# Altium PCB SFarm.PcbDoc (part 1 of 2)
Units mil, origin at the board's own origin, x right, y up, seen from the top; angles counter-clockwise.
Board outline 5511.81 x 3149.61 mil, 2 copper layers (Top Layer, Bottom Layer), stack 61.855 mil thick; 89 components, 71 nets, 378 pads, 334 vias.
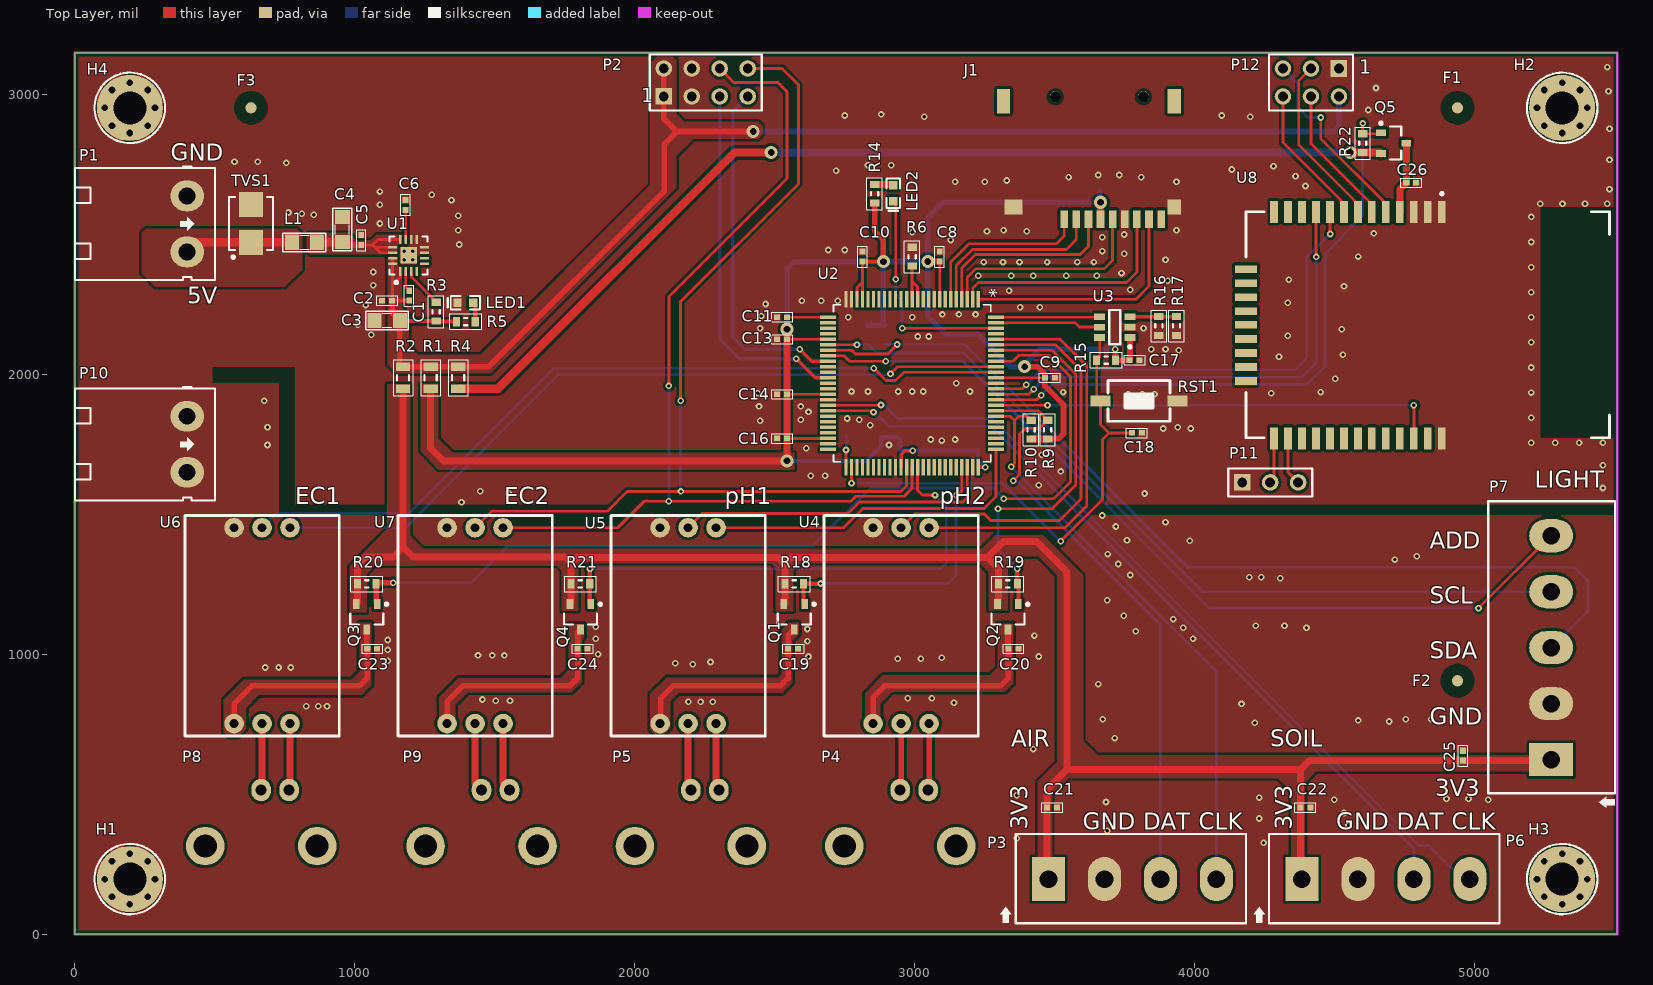
[diagram p0: Top Layer view]
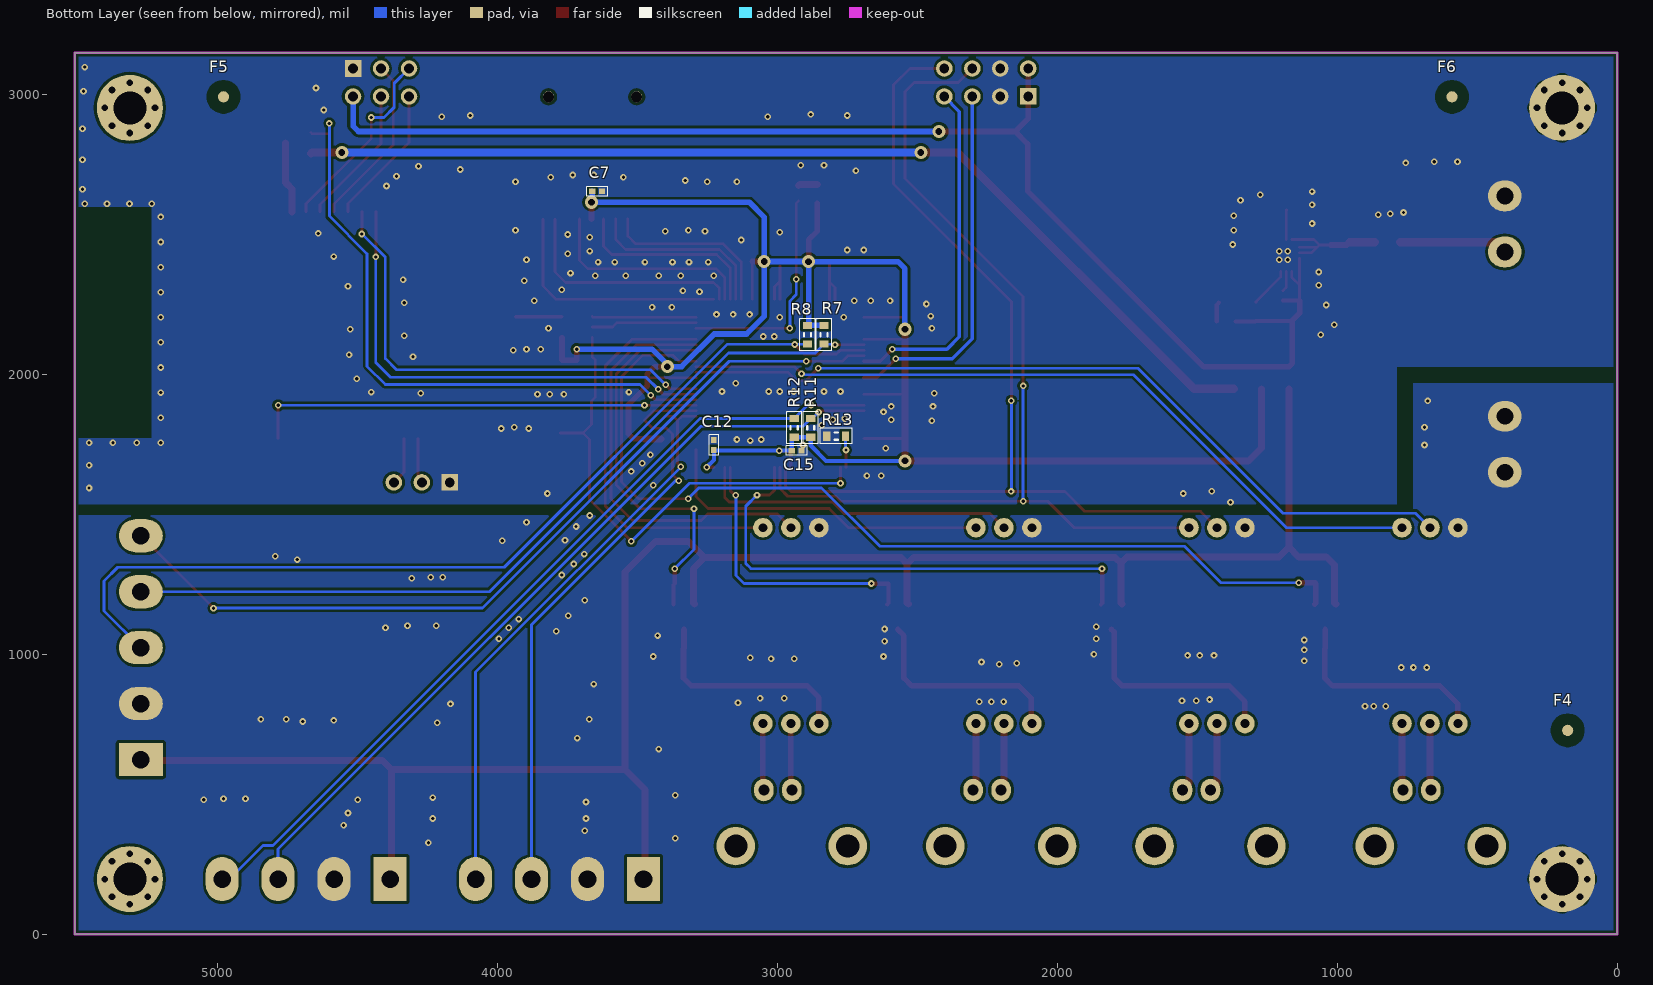
[diagram p1: Bottom Layer view, seen from below]
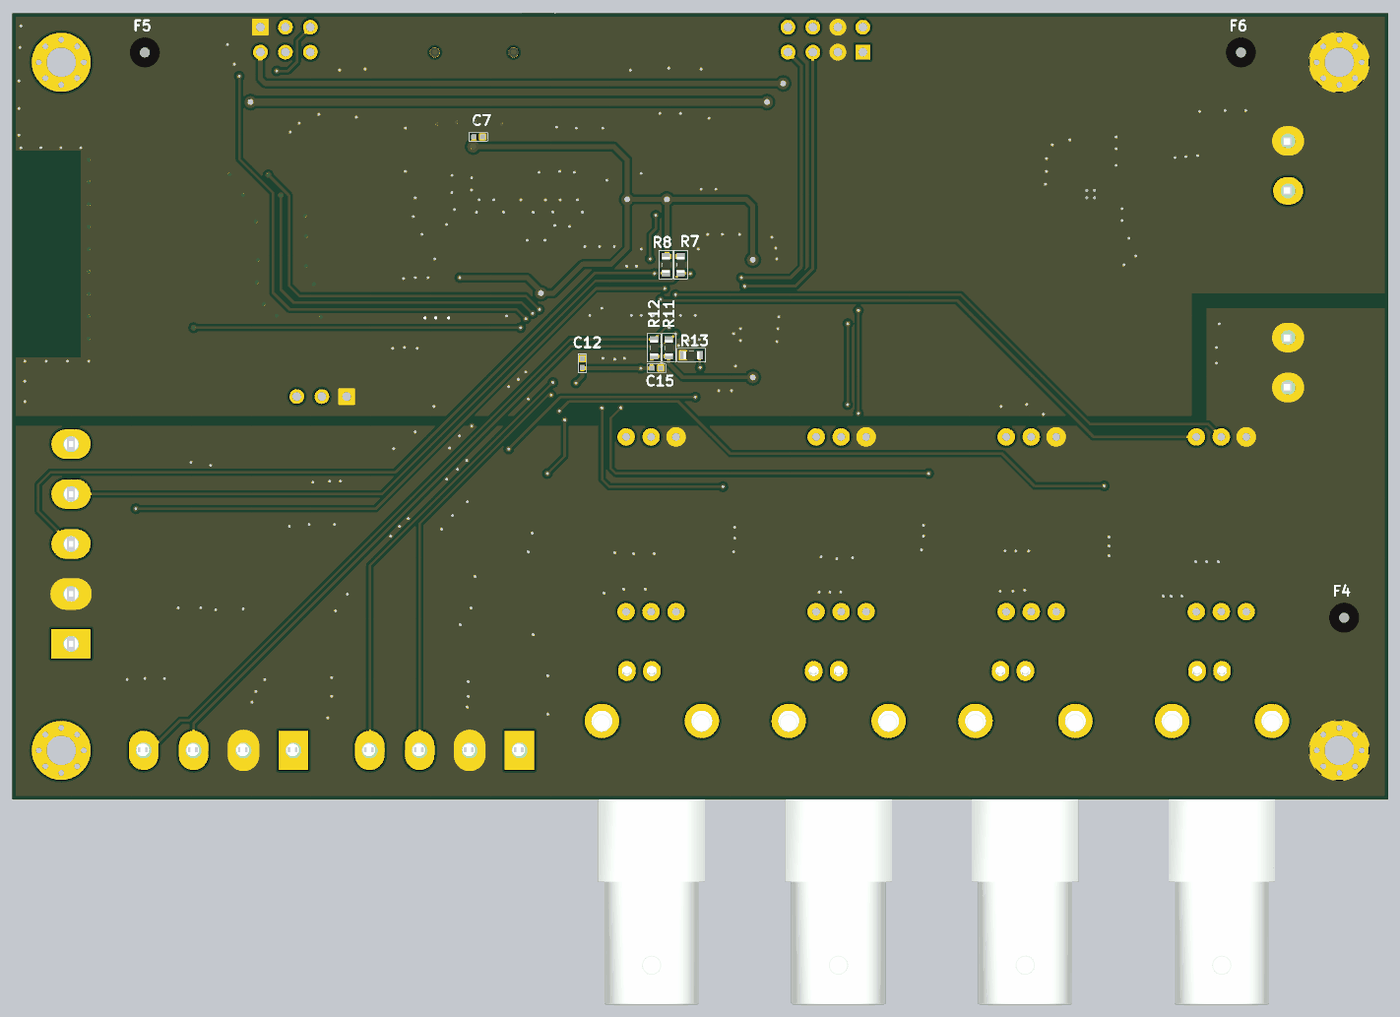
[diagram p2: 3D render of the assembled board from below, using the file's embedded part models]

## Layer stack, top to bottom
Top Solder: solder mask 0.4, Solder Resist, Dk 3.5
Top Layer: signal copper 1.4
Dielectric 1: dielectric 59.0551, FR-4, Dk 4.8
Bottom Layer: signal copper 1.4
Bottom Solder: solder mask 0.4, Solder Resist, Dk 3.5

## Board outline
0,0 5511.81,0 5511.81,3149.61 0,3149.61

## Design rules (kind name [scope] priority, off if disabled: settings)
Clearance Clearance_PR [All vs InPolygon] p1: gap=10 ignorepadtopadclearanceinfootprint=FALSE
Clearance [All] p2: gap=6 ignorepadtopadclearanceinfootprint=FALSE
HoleSize [All] p1: absolutevalues=TRUE maxlimit=1000 minlimit=1 maxpercent=80.000 minpercent=20.000
HoleToHoleClearance [All] p1: gap=1 allowstackedmicrovias=TRUE
MinimumSolderMaskSliver [All] p1: minsoldermaskwidth=1
PolygonConnect [All] p1: connectstyle=Direct reliefconductorwidth=10 reliefentries=4 polygonreliefangle="90 Angle" airgapwidth=10
RoutingVias [All] p1: holewidth=11.81 width=23.62 viastyle="Through Hole" minholewidth=11.81 minwidth=23.62 maxholewidth=23.62 maxwidth=47.24
SilkToSilkClearance [All] p1: silktosilkclearance=1
SilkToSolderMaskClearance [IsPad] p1: minsilkscreentomaskgap=1 clearancetoexposedcopper=TRUE
SolderMaskExpansion [All] p1: expansion=4
Width [All] p1: maxlimit=40 minlimit=8 preferedwidth=12
25 further rules are at their usual default settings.

## Classes and differential pairs
component class SENSOR: C19 C20 C21 C22 C23 C24 C25 P3 P4 P5 P6 P7 P8 P9 P10 Q1 Q2 Q3 Q4 R18 R19 R20 R21 U4 U5 U6 U7
component class POWER: C1 C2 C3 C4 C5 C6 F1 F2 F3 H1 H2 H3 H4 L1 LED1 P1 R1 R2 R3 R4 R5 TVS1 U1
component class MCU: C7 C8 C9 C10 C11 C12 C13 C14 C15 C16 C17 C18 J1 LED2 P2 R6 R7 R8 R9 R10 R11 R12 R13 R14 R15 R16 R17 RST1 U2 U3
component class CONNECTIVITY: C26 P11 P12 Q5 R22 U8

## Components (designator, comment, footprint, x,y, rotation, side; value= is the part's Value field where it differs from the comment)
C1 "0.1µF" C0402M 1194.88,2281.5 r270 top
C2 "0.1µF" C0402M 1116.14,2263.78 r0 top
C3 "10µF" "0805 cap" 1071.42,2192.91 r0 top
C4 "10µF" "0805 cap" 956.69,2562.44 r270 top
C5 "0.1µF" C0402M 1023.62,2480.32 r270 top
C6 "0.1µF" C0402M 1182,2606 r270 top
C7 "0.1µF" C0402M 3645,2654 r180 bottom
C8 "0.1µF" C0402M 3090.55,2421.26 r90 top
C9 "0.1µF" C0402M 3484.25,1988.19 r0 top
C10 "0.1µF" C0402M 2815,2421 r90 top
C11 "0.1µF" C0402M 2527.56,2204.72 r180 top
C12 "0.1µF" C0402M 3228,1748 r90 bottom
C13 "0.1µF" C0402M 2527.56,2125.98 r180 top
C14 "0.1µF" C0402M 2527.56,1929.13 r0 top
C15 "0.1µF" C0402M 2932,1728 r180 bottom
C16 "0.1µF" C0402M 2527.56,1771.65 r0 top
C17 "0.1µF" C0402M 3787.4,2051.18 r180 top
C18 "0.1µF" C0402M 3795.28,1791.34 r180 top
C19 "0.1µF" C0402M 2566.93,1019.68 r180 top
C20 "0.1µF" C0402M 3354.33,1019.68 r180 top
C21 "0.1µF" C0402M 3492.13,452.76 r180 top
C22 "0.1µF" C0402M 4397.64,452.76 r180 top
C23 "0.1µF" C0402M 1062.99,1019.68 r180 top
C24 "0.1µF" C0402M 1814.96,1019.68 r180 top
C25 "0.1µF" C0402M 4960.63,637.8 r270 top
C26 "0.1uF" C0402M 4775.59,2685.04 r180 top
F1 "" fiducials 4940.94,2952.76 r0 top
F2 "" fiducials 4940.94,905.51 r0 top
F3 "" fiducials 629.92,2952.76 r0 top
F4 "" fiducials 177.17,728.35 r180 bottom (schematic designator F3)
F5 "" fiducials 4980.32,2992.13 r180 bottom (schematic designator F3)
F6 "" fiducials 590.55,2992.13 r180 bottom (schematic designator F3)
H1 "HoleM3" HOLEM3via 196.85,196.85 r0 top
H2 "HoleM3" HOLEM3via 5314.96,2952.76 r0 top
H3 "HoleM3" HOLEM3via 5314.96,196.85 r0 top
H4 "HoleM3" HOLEM3via 196.85,2952.76 r0 top
J1 "Header 11" TF_V3 3318.9,2976.38 r180 top
L1 "42" 0805F 776.14,2472.44 r0 top
LED1 "LedRed0603" 0603LED-RED 1397.64,2255.91 r180 top
LED2 "LedGreen0603" 0603LED-GREEN 2925.2,2649.61 r270 top
P1 "Header 2" HED2T 401.57,2637.8 r270 top
P2 "Header 4X2H" HDR2X4 2104.72,2993.31 r0 top
P3 "Header 4H" TERMINAL4_5.08 3779.53,196.85 r0 top
P4 "BNC connector" BNC 2949.61,514.96 r180 top
P5 "BNC connector" BNC 2201.57,514.96 r180 top
P6 "Header 4H" TERMINAL4_5.08 4685.04,196.85 r0 top
P7 "Header 5" TERMINAL5_5.08 5275.59,1023.62 r90 top
P8 "BNC connector" BNC 666.14,514.96 r180 top
P9 "BNC connector" BNC 1453.54,514.96 r180 top
P10 "Header 2" HED2T 401.57,1850.39 r270 top
P11 "Header 3" HDR1X3 4271.65,1614.17 r0 top
P12 "Header 3X2" HDR2X3 4417.32,3043.31 r180 top
Q1 "AO3401" SOT23-3N 2570.87,1133.86 r270 top
Q2 "AO3401" SOT23-3N 3334.65,1133.86 r270 top
Q3 "AO3401" SOT23-3N 1043.31,1133.86 r270 top
Q4 "AO3401" SOT23-3N 1807.09,1133.86 r270 top
Q5 "AO3401" SOT23-3N 4712.6,2826.77 r0 top
R1 "0" R0805M 1271.65,1988.19 r270 top
R2 "0" R0805M 1173.23,1988.19 r270 top
R3 "1.5k" R0603M 1291.34,2224.41 r270 top
R4 "0" R0805M 1370.08,1988.19 r270 top
R5 "1k" R0603M 1397.64,2188.98 r180 top
R6 "10k" R0603M 2992.13,2421.26 r270 top
R7 "10k" R0603M 2834.65,2141.73 r90 bottom
R8 "10k" R0603M 2893.7,2141.73 r90 bottom
R9 "10k" R0603M 3476.38,1803.15 r270 top
R10 "10k" R0603M 3417.32,1803.15 r270 top
R11 "10k" R0603M 2881.89,1809.3 r270 bottom
R12 "10k" R0603M 2940.94,1809.3 r270 bottom
R13 "0.0" R0603M 2791.34,1779.53 r180 bottom
R14 "1k" R0603M 2858.27,2645.67 r90 top
R15 "10k" R0603M 3685.04,2051.18 r180 top
R16 "187k" R0603M 3874.02,2173.23 r90 top
R17 "182k" R0603M 3937.01,2173.23 r90 top
R18 "10k" R0603M 2570.87,1251.97 r180 top
R19 "10k" R0603M 3334.65,1251.97 r180 top
R20 "10k" R0603M 1043.31,1251.97 r180 top
R21 "10k" R0603M 1807.09,1251.97 r180 top
R22 "10k" R0603M 4602.36,2826.77 r270 top
RST1 "Button" SWSMD 3803.15,1905.51 r180 top
TVS1 "SMBJ7.0A" DIOM4436X26N 629.92,2539.37 r90 top
U1 "TPS7A7100" QFN16 1192.91,2425.2 r90 top
U2 "MK64FN1M0VLL12" LQFP-100_14X14X1 2992.13,1968.5 r270 top
U3 "TPL5010-Q1" SOT23-6 3716.54,2169.29 r180 top
U4 "pH AFE" "pH AFE" 2952.76,1102.36 r90 top
U5 "pH AFE" "pH AFE" 2191.6,1102.36 r90 top
U6 "pH AFE" "pH AFE" 669.29,1102.36 r90 top
U7 "pH AFE" "pH AFE" 1430.45,1102.36 r90 top
U8 "VZIGMOD1" VZIGMOD2 4185.04,2581.1 r270 top

## Footprints (in the part's own frame and the unit in brackets; to place one, negate y for a bottom-side part, rotate by r counter-clockwise, add the part's x,y. Pads: shape width x height; smd on the part's side, far side on the other; paste and mask are expansions set on the pad)
0603LED-GREEN [mil]
  rect 30x30 smd: 1(-26,0) 2(30,0)
  silkscreen extent -50,-24 65,24, body extent -29,-16 33,16, height 24
0603LED-RED [mil]
  rect 30x30 smd: 1(-26,0) 2(30,0)
  silkscreen extent -50,-24 65,24, body extent -31,-16 32,16, height 24
"0805 cap" [mil]
  rect 50x55 smd: 1(0,0) 2(90,0)
  silkscreen extent -32,-34 121,33, body extent 5,-27 85,23, height 24
0805F [mil]
  rect 50x55 smd: 1(0,0) 2(90,0)
  silkscreen extent -32,-34 121,33, body extent 6,-27 85,23, height 33
BNC [mm] "BNC connector"
  oval 1.778x2.032 hole 1: 1(0,0) 2(-2.54,0)
  round 3.5 hole 2.1: 3(-5.08,5.08) 3(5.08,5.08)
  body extent -7.41,-1.82 7.35,33.93, height 15.21
C0402M [mm] "Capacitor 0402"
  rect 0.55x0.51 smd: 1(-0.45,0) 2(0.45,0)
  silkscreen extent -0.95,-0.43 0.95,0.43, body extent -0.53,-0.28 0.53,0.27, height 0.55
DIOM4436X26N [mm] "Molded Diode, 2-Leads, Body 4.40x3.62mm, IPC Medium Density"
  rect 2.3x2.15 smd: 1(1.725,0) 2(-1.725,0)
  silkscreen extent -3.17,-2 2.4,2, body extent -2.6,-1.97 2.6,1.97, height 2.61
fiducials [mil]
  round 40 smd mask+40: ""(0,0)
  Top Layer pour cut-out: 0,-60 -22.96,-55.43 -42.43,-42.43 -55.43,-22.96 -60,0 -60,0 -55.43,22.96 -42.43,42.43 -22.96,55.43 0,60 0,60 22.96,55.43 42.43,42.43 55.43,22.96 60,0 60,0 55.43,-22.96 42.43,-42.43 22.96,-55.43 0,-60
HDR1X3 [mm] "Connector; Header; 3 Position"
  rect 1.5x1.5 hole 0.9: 1(-2.54,0)
  round 1.5 hole 0.9: 2(0,0) 3(2.54,0)
  silkscreen extent -3.81,-1.27 3.81,1.27
HDR2X3 [mm] "Connector; Header; 3x2 Position"
  rect 1.5x1.5 hole 0.9: 1(-2.54,-1.27)
  round 1.5 hole 0.9: 2(-2.54,1.27) 3(0,-1.27) 4(0,1.27) 5(2.54,-1.27) 6(2.54,1.27)
  silkscreen extent -3.81,-2.54 3.81,2.54
HDR2X4 [mm] "Connector; Header; 4x2 Position"
  rect 1.5x1.5 hole 0.9: 1(0,0)
  round 1.5 hole 0.9: 2(0,2.54) 3(2.54,0) 4(2.54,2.54) 5(5.08,0) 6(5.08,2.54) 7(7.62,0) 8(7.62,2.54)
  silkscreen extent -1.27,-1.27 8.89,3.81
HED2T [mil] "Header 2, 2 pin, hight 300mil, Pin to Pin 200, Colour Green"
  oval 110x120 hole 60: 1(0,0) 2(200,0)
  silkscreen extent -105,-400 300,100, body extent -97,-399 297,73, height 334
HOLEM3via [mm]
  round 6 hole 3: ""(0,0)
  silkscreen extent -3.19,-3.2 3.2,3.2
LQFP-100_14X14X1 [mm]
  rect 1.461x0.3 smd: 1(-7.625,6) 2(-7.625,5.5) 3(-7.625,5) 4(-7.625,4.5) 5(-7.625,4) 6(-7.625,3.5) 7(-7.625,3) 8(-7.625,2.5) 9(-7.625,2) 10(-7.625,1.5) 11(-7.625,1) 12(-7.625,0.5) 13(-7.625,0) 14(-7.625,-0.5) 15(-7.625,-1) 16(-7.625,-1.5) 17(-7.625,-2) 18(-7.625,-2.5) 19(-7.625,-3) 20(-7.625,-3.5) 21(-7.625,-4) 22(-7.625,-4.5) 23(-7.625,-5) 24(-7.625,-5.5) 25(-7.625,-6) 51(7.625,-6) 52(7.625,-5.5) 53(7.625,-5) 54(7.625,-4.5) 55(7.625,-4) 56(7.625,-3.5) 57(7.625,-3) 58(7.625,-2.5) 59(7.625,-2) 60(7.625,-1.5) 61(7.625,-1) 62(7.625,-0.5) 63(7.625,0) 64(7.625,0.5) 65(7.625,1) 66(7.625,1.5) 67(7.625,2) 68(7.625,2.5) 69(7.625,3) 70(7.625,3.5) 71(7.625,4) 72(7.625,4.5) 73(7.625,5) 74(7.625,5.5) 75(7.625,6)
  rect 0.3x1.461 smd: 26(-6,-7.625) 27(-5.5,-7.625) 28(-5,-7.625) 29(-4.5,-7.625) 30(-4,-7.625) 31(-3.5,-7.625) 32(-3,-7.625) 33(-2.5,-7.625) 34(-2,-7.625) 35(-1.5,-7.625) 36(-1,-7.625) 37(-0.5,-7.625) 38(0,-7.625) 39(0.5,-7.625) 40(1,-7.625) 41(1.5,-7.625) 42(2,-7.625) 43(2.5,-7.625) 44(3,-7.625) 45(3.5,-7.625) 46(4,-7.625) 47(4.5,-7.625) 48(5,-7.625) 49(5.5,-7.625) 50(6,-7.625) 76(6,7.625) 77(5.5,7.625) 78(5,7.625) 79(4.5,7.625) 80(4,7.625) 81(3.5,7.625) 82(3,7.625) 83(2.5,7.625) 84(2,7.625) 85(1.5,7.625) 86(1,7.625) 87(0.5,7.625) 88(0,7.625) 89(-0.5,7.625) 90(-1,7.625) 91(-1.5,7.625) 92(-2,7.625) 93(-2.5,7.625) 94(-3,7.625) 95(-3.5,7.625) 96(-4,7.625) 97(-4.5,7.625) 98(-5,7.625) 99(-5.5,7.625) 100(-6,7.625)
  silkscreen extent -7.13,-7.13 7.13,7.13, body extent -6.86,-6.86 6.86,6.86, height 0.3
"pH AFE" [mil]
  round 70 hole 31.5: 1(-350,100) 2(-350,0) 3(-350,-100) 4(350,-100) 5(350,0) 6(350,100)
  silkscreen extent -394,-276 394,276, body extent -394,-275 393,276, height 79
QFN16 [mm] "QFN, 16-Leads, Body 3.00x3.00mm, Pitch 0.50mm, Thermal Pad 1.66x1.66mm, IPC Medium Density"
  oval 0.85x0.25 smd: 1(-1.45,0.75) 2(-1.45,0.25) 3(-1.45,-0.25) 4(-1.45,-0.75) 9(1.45,-0.75) 10(1.45,-0.25) 11(1.45,0.25) 12(1.45,0.75)
  oval 0.25x0.85 smd: 5(-0.75,-1.45) 6(-0.25,-1.45) 7(0.25,-1.45) 8(0.75,-1.45) 13(0.75,1.45) 14(0.25,1.45) 15(-0.25,1.45) 16(-0.75,1.45)
  rect 1.5x1.5 smd: 17(0,0)
  silkscreen extent -2.57,-1.73 1.73,1.73, body extent -1.58,-1.58 1.58,1.58, height 1
R0603M [mm] "Chip Resistor 0603"
  rect 0.65x0.85 smd: 1(-0.85,0) 2(0.85,0)
  silkscreen extent -1.45,-0.7 1.45,0.7, body extent -0.8,-0.4 0.8,0.4, height 0.55
R0805M [mm] "Chip Resistor 0805"
  rect 0.75x1.3 smd: 1(-1,0) 2(1,0)
  silkscreen extent -1.65,-0.9 1.65,0.9, body extent -1,-0.63 1,0.63, height 0.6
SOT23-3N [mm] "SOT23, 3-Leads, Body 2.90x2.30mm, Pitch 0.95mm, IPC Medium Density"
  rect 0.9x0.6 smd: 1(-1.15,0.95) 2(-1.15,-0.95) 3(1.15,0)
  silkscreen extent -1.27,-1.5 0.7,1.93, body extent -0.7,-1.5 0.7,1.5, height 1.1
SOT23-6 [mm] "SOT23, 6-Leads, Body 2.90x2.80mm, Pitch 0.95mm, IPC Medium Density"
  rect 1x0.6 smd: 1(-1.375,0.95) 2(-1.375,0) 3(-1.375,-0.95) 4(1.375,-0.95) 5(1.375,0) 6(1.375,0.95)
  silkscreen extent -1.5,-1.55 0.5,1.92, body extent -0.88,-1.52 0.87,1.53, height 1.45
SWSMD [mm]
  rect 1.8x1 smd: 1(-3.5,0) 2(3.5,0)
  silkscreen extent -2.82,-1.85 2.82,1.85, body extent -3.05,-1.85 3.05,1.85, height 2.5
TERMINAL4_5.08 [mm]
  rect 3x4 hole 1.6: 1(-7.62,0)
  oval 3x4 hole 1.6: 2(-2.54,0) 3(2.54,0) 4(7.62,0)
  silkscreen extent -12,-4 10.3,4.1, body extent -10.64,-4 10.25,4.1, height 10
TERMINAL5_5.08 [mm]
  rect 3x4 hole 1.6: 1(-10.16,0)
  oval 3x4 hole 1.6: 2(-5.08,0) 3(0,0) 4(5.08,0) 5(10.16,0)
  silkscreen extent -14.54,-5.8 13.3,5.7, body extent -13.29,-5.9 13.29,5.72, height 18
TF_V3 [mm]
  round 1 hole 1: 0(-12.7,-0.4) 0(-4.7,-0.4)
  rect 0.7x1.6 smd: 1(-5.5,10.7) 2(-6.6,10.7) 3(-7.7,10.7) 4(-8.8,10.7) 5(-9.9,10.7) 6(-11,10.7) 7(-12.1,10.7) 8(-13.2,10.7) 9(-14.3,10.7)
  rect 1.2x1.4 smd: 10(-15.5,9.6)
  rect 1.6x1.4 smd: 11(-0.9,9.6)
  rect 1.2x2.2 smd: 12(0,0) 13(-15.5,0)
  body extent -15.79,-4.46 0.31,10.54, height 1.85
VZIGMOD2 [mm]
  rect 2x0.7 smd: 1(0,17.78) 2(0,16.51) 3(0,15.24) 4(0,13.97) 5(0,12.7) 6(0,11.43) 7(0,10.16) 8(0,8.89) 9(0,7.62) 10(0,6.35) 11(0,5.08) 12(0,3.81) 13(0,2.54) 23(20.56,2.54) 24(20.56,3.81) 25(20.56,5.08) 26(20.56,6.35) 27(20.56,7.62) 28(20.56,8.89) 29(20.56,10.16) 30(20.56,11.43) 31(20.56,12.7) 32(20.56,13.97) 33(20.56,15.24) 34(20.56,16.51) 35(20.56,17.78)
  rect 0.7x2 smd: 14(5.2,0) 15(6.47,0) 16(7.74,0) 17(9.01,0) 18(10.25,0) 19(11.55,0) 20(12.82,0) 21(14.09,0) 22(15.36,0)
  silkscreen extent -1.79,0 20.5,33, body extent 0,0 20.5,33, height 2.05

## Part data
C1 C2 C5 C6 C7 C8 C9 C10 C11 C12 C13 C14 C15 C16 C17 C18 C19 C20 C21 C22 C23 C24 C25: library part CAP0.1u0402, "CAP CER 0.1UF 10V X7R 0402", Manufacturer="Taiyo Yuden", Manufacturer Part Number=LMK105B7104KVHF, Operating Temperature="-55°C ~ 125°C", Package / Case="0402 (1005 Metric)", Ratings=AEC-Q200, Supplier Part Number 1=587-3769-1-ND, Temperature Coefficient=X7R, Tolerance=±10%, Voltage - Rated=10V, Applications=Automotive, Capacitance=0.1µF, Category=Capacitors, ComponentLink1Description=http://www.yuden.co.jp/productdata/catalog/en/mlcc_all_hq_e.pdf, ComponentLink1URL=http://www.yuden.co.jp/productdata/catalog/en/mlcc_all_hq_e.pdf, Features=-, Height - Seated (Max)=-, Lead Spacing=-, Lead Style=-, Mounting Type="Surface Mount, MLCC", Packaging="Cut Tape (CT)", Part Status=Active, Pricing 1="1=0.1, 10=0.05, 100=0.0223, 500=0.01594, 1000=0.01252, 2500=0.01138, 5000=0.01047 (USD)", RoHS="RoHS Compliant", Size / Dimension="0.039\" L x 0.020\" W (1.00mm x 0.50mm)", Stock 1=23930, Supplier 1=Digi-Key, Thickness (Max)="0.022\" (0.55mm)"
C3 C4: library part cap10u0805, "CAP CER 10UF 16V X7R 0805", Manufacturer="Taiyo Yuden", Manufacturer Part Number=EMK212BB7106MG-T, Operating Temperature="-55°C ~ 125°C", Package / Case="0805 (2012 Metric)", Ratings=-, Supplier Part Number 1=587-3319-1-ND, Temperature Coefficient=X7R, Tolerance=±20%, Voltage - Rated=16V, Applications="General Purpose", Capacitance=10µF, Category=Capacitors, ComponentLink1Description=http://www.yuden.co.jp/productdata/catalog/en/mlcc06_e.pdf, ComponentLink1URL=http://www.yuden.co.jp/productdata/catalog/en/mlcc06_e.pdf, Features=-, Height - Seated (Max)=-, Lead Spacing=-, Lead Style=-, Mounting Type="Surface Mount, MLCC", Packaging="Cut Tape (CT)", Part Status=Active, Pricing 1="1=0.51, 10=0.351, 100=0.2106, 500=0.15798, 1000=0.1334 (USD)", RoHS="RoHS Compliant", Size / Dimension="0.079\" L x 0.049\" W (2.00mm x 1.25mm)", Stock 1=221600, Supplier 1=Digi-Key, Thickness (Max)="0.053\" (1.35mm)"
C26: library part CAP0.1u0402, "CAP CER 0.1UF 16V X7R 0402", Manufacturer="Samsung Electro-Mechanics", Manufacturer Part Number=CL05B104KO5NNNC, Operating Temperature="-55°C ~ 125°C", Package / Case="0402 (1005 Metric)", Ratings=-, Supplier Part Number 1=1276-1001-6-ND, Temperature Coefficient=X7R, Tolerance=±10%, Voltage - Rated=16V, Applications="General Purpose", Category=Capacitors, ComponentLink1Description=http://www.samsungsem.com/kr/support/product-search/mlcc/CL05B104KO5NNNC.jsp, ComponentLink1URL=http://www.samsungsem.com/kr/support/product-search/mlcc/CL05B104KO5NNNC.jsp, Features=-, Height - Seated (Max)=-, Lead Spacing=-, Lead Style=-, Module=Connectivity, Mounting Type="Surface Mount, MLCC", Notification="Current market demand for these product types have resulted in fluctuating and extending lead times. Lead times may differ.", Packaging=Digi-Reel®, Part Status=Active, Pricing 1="1=0.1, 10=0.03, 100=0.0134, 500=0.00958, 1000=0.00753, 2500=0.00684, 5000=0.0063 (USD)", RoHS="RoHS Compliant", Size / Dimension="0.039\" L x 0.020\" W (1.00mm x 0.50mm)", Stock 1=100000, Supplier 1=Digi-Key, Thickness (Max)="0.022\" (0.55mm)"
F1 F2 F3 F4 F5 F6: library part Fiducials
J1: "Header, 11-Pin", LatestRevisionDate=17-Jul-2002, LatestRevisionNote="Re-released for DXP Platform.", Module=Micro-SD, Publisher="Altium Limited"
L1: library part "Ferrite Bead", "FERRITE BEAD 42 OHM 0805 1LN", Current Rating (Max)=4A, DC Resistance (DCR) (Max)="8 mOhm", Impedance @ Frequency="42 Ohm @ 100MHz", Manufacturer="Taiyo Yuden", Manufacturer Part Number=FBMJ2125HS420-TV, Operating Temperature="-40°C ~ 125°C", Package / Case="0805 (2012 Metric)", Ratings=AEC-Q200, Supplier Part Number 1=587-3851-6-ND, Category=Filters, ComponentLink1Description=http://ds.yuden.co.jp/TYCOMPAS/ut/detail.do?productNo=FBMJ2125HS420-TV&fileName=FBMJ2125HS420-TV_SS&mode=specSheetDownload, ComponentLink1URL=http://ds.yuden.co.jp/TYCOMPAS/ut/detail.do?productNo=FBMJ2125HS420-TV&fileName=FBMJ2125HS420-TV_SS&mode=specSheetDownload, Filter Type="Power Line", Height (Max)="0.041\" (1.05mm)", Mounting Type="Surface Mount", Number of Lines=1, Packaging=Digi-Reel®, Part Status=Active, Pricing 1="1=0.2, 10=0.154, 25=0.1276, 50=0.11, 100=0.099, 250=0.0836, 500=0.0748, 1000=0.0638 (USD)", RoHS="RoHS Compliant", Size / Dimension="0.079\" L x 0.049\" W (2.00mm x 1.25mm)", Stock 1=2013, Supplier 1=Digi-Key
LED1: "LED RED CLEAR 0603 SMD", Color=Red, Current - Test=20mA, Lens Color=Colorless, Manufacturer="Everlight Electronics Co Ltd", Manufacturer Part Number=QTLP600C7TR, Millicandela Rating=20mcd, Package / Case="0603 (1608 Metric)", Supplier Part Number 1=1080-1400-1-ND, Voltage - Forward (Vf) (Typ)=1.9V, Category=Optoelectronics, ComponentLink1Description=http://media.digikey.com/pdf/Data%20Sheets/Everlight%20PDFs/QTLP600C.pdf, ComponentLink1URL=http://media.digikey.com/pdf/Data%20Sheets/Everlight%20PDFs/QTLP600C.pdf, Features=-, Height (Max)=0.80mm, Lens Style/Size="Rectangle with Flat Top, 1.20mm x 0.80mm", Lens Transparency=Clear, Mounting Type="Surface Mount", Packaging="Cut Tape (CT)", Part Status=Active, Pricing 1="1=0.41, 10=0.297, 25=0.2276, 100=0.1485, 250=0.10892, 500=0.0924, 1000=0.0759 (USD)", RoHS="RoHS Compliant", Size / Dimension="1.60mm L x 0.80mm W", Stock 1=19325, Supplier 1=Digi-Key, Viewing Angle=100°, Wavelength - Dominant=645nm, Wavelength - Peak=660nm
LED2: "LED GREEN CLEAR 0603 SMD", Color=Green, Current - Test=20mA, Lens Color=Colorless, Manufacturer="Everlight Electronics Co Ltd", Manufacturer Part Number=QTLP601C4TR, Millicandela Rating=15mcd, Package / Case="0603 (1608 Metric)", Supplier Device Package=0603, Supplier Part Number 1=1080-1405-1-ND, Voltage - Forward (Vf) (Typ)=2.1V, Category=Optoelectronics, ComponentLink1Description=http://media.digikey.com/pdf/Data%20Sheets/Everlight%20PDFs/QTLP601C-2,3,4,7,B.pdf, ComponentLink1URL=http://media.digikey.com/pdf/Data%20Sheets/Everlight%20PDFs/QTLP601C-2,3,4,7,B.pdf, Features=-, Height (Max)=0.60mm, Lens Style/Size="Rectangle with Flat Top, 1.20mm x 0.80mm", Lens Transparency=Clear, Mounting Type="Surface Mount", Packaging="Cut Tape (CT)", Part Status=Active, Pricing 1="1=0.51, 10=0.366, 25=0.2808, 100=0.1832, 250=0.13432, 500=0.11396, 1000=0.09361 (USD)", RoHS="RoHS Compliant", Size / Dimension="1.60mm L x 0.80mm W", Stock 1=19080, Supplier 1=Digi-Key, Viewing Angle=120°, Wavelength - Dominant=570nm, Wavelength - Peak=565nm
P1 P10: "Header, 2-Pin", LatestRevisionDate=17-Jul-2002, LatestRevisionNote="Re-released for DXP Platform.", Publisher="Altium Limited"
P2: "Header, 4-Pin, Dual row, Right Angle", LatestRevisionDate=17-Jul-2002, LatestRevisionNote="Re-released for DXP Platform.", Publisher="Altium Limited"
P3 P6: "TERM BLOCK PLUG 4POS STR 5.08MM", Color=Green, Current - IEC=12A, Manufacturer="Phoenix Contact", Manufacturer Part Number=1758377, Material Flammability Rating="UL94 V-0", Operating Temperature=-, Supplier Part Number 1=277-1966-ND, Category="Connectors, Interconnects", ComponentLink1Description=https://media.digikey.com/PDF/Data%20Sheets/Phoenix%20Contact%20PDFs/1758377.pdf, ComponentLink1URL=https://media.digikey.com/PDF/Data%20Sheets/Phoenix%20Contact%20PDFs/1758377.pdf, Contact Material=-, Contact Mating Finish=Tin, Contact Tail Length=-, Features="Positions Stamped, Retention Latches (Non-Wire Side)", Header Orientation=-, Housing Material="Polyamide (PA), Nylon", Ingress Protection=-, Insulation Height="0.591\" (15.00mm)", LatestRevisionDate=17-Jul-2002, LatestRevisionNote="Re-released for DXP Platform.", Mounting Type="Free Hanging (In-Line)", Number of Levels=1, Number of Positions=4, Packaging=Bulk, Part Status=Active, Pitch="0.200\" (5.08mm)", Plug Wire Entry=180°, Positions Per Level=4, Pricing 1="1=4.13, 10=3.949, 50=3.8412, 100=3.59, 250=3.30284, 500=3.0515, 1000=2.90793, 2500=2.7284 (USD)", Publisher="Altium Limited", RoHS="RoHS Compliant", Screw Size=M3, Stock 1=185, Supplier 1=Digi-Key, Termination Style="Screw - Clamping Yoke (Tension Sleeve)", Torque - Screw="0.5-0.6 Nm (4.4-5.3 Lb-In)", Type="Plug, Female Sockets", Wire Gauge or Range - AWG="12-30 AWG", Wire Gauge or Range - mm²=0.2-2.5mm², Wire Strip Length=7mm
P7: "TERM BLOCK PLUG 5POS STR 5.08MM", Color=Green, Current - IEC=12A, Manufacturer="Phoenix Contact", Manufacturer Part Number=1757048, Material Flammability Rating="UL94 V-0", Operating Temperature=-, Supplier Part Number 1=277-1014-ND, Category="Connectors, Interconnects", ComponentLink1Description=https://media.digikey.com/pdf/Data%20Sheets/Phoenix%20Contact%20PDFs/1757048.pdf, ComponentLink1URL=https://media.digikey.com/pdf/Data%20Sheets/Phoenix%20Contact%20PDFs/1757048.pdf, Contact Material=-, Contact Mating Finish=Tin, Contact Tail Length=-, Features="Retention Latches (Non-Wire Side)", Header Orientation=-, Housing Material="Polyamide (PA), Nylon", Ingress Protection=-, Insulation Height="0.591\" (15.00mm)", LatestRevisionDate=17-Jul-2002, LatestRevisionNote="Re-released for DXP Platform.", Mounting Type="Free Hanging (In-Line)", Number of Levels=1, Number of Positions=5, Packaging=Bulk, Part Status=Active, Pitch="0.200\" (5.08mm)", Plug Wire Entry=180°, Positions Per Level=5, Pricing 1="1=4.69, 10=4.488, 50=4.3656, 100=4.08, 250=3.75364, 500=3.46802, 1000=3.30483, 2500=3.1008 (USD)", Publisher="Altium Limited", RoHS="RoHS Compliant", Screw Size=M3, Stock 1=1718, Supplier 1=Digi-Key, Termination Style="Screw - Clamping Yoke (Tension Sleeve)", Torque - Screw="0.5-0.6 Nm (4.4-5.3 Lb-In)", Type="Plug, Female Sockets", Wire Gauge or Range - AWG="12-30 AWG", Wire Gauge or Range - mm²=0.2-2.5mm², Wire Strip Length=7mm
P11: "Header, 3-Pin", LatestRevisionDate=17-Jul-2002, LatestRevisionNote="Re-released for DXP Platform.", Publisher="Altium Limited"
P12: "Header, 3-Pin, Dual row", LatestRevisionDate=17-Jul-2002, LatestRevisionNote="Re-released for DXP Platform.", Publisher="Altium Limited"
Q1 Q2 Q3 Q4 Q5: library part MOSFET-P1, "P-Channel MOSFET"
R1 R2 R4: library part RES00805, "RES SMD 0.0 OHM JUMPER 1/8W 0805", Manufacturer="Panasonic Electronic Components", Manufacturer Part Number=ERJ-6GEY0R00V, Operating Temperature="-55°C ~ 155°C", Package / Case="0805 (2012 Metric)", Power (Watts)="0.125W, 1/8W", Resistance (Ohms)=0.0, Supplier Device Package=0805, Supplier Part Number 1=P0.0ACT-ND, Temperature Coefficient=-, Tolerance=Jumper, Category=Resistors, ComponentLink1Description=http://industrial.panasonic.com/www-cgi/jvcr13pz.cgi?E+PZ+3+AOA0001+ERJ6GEY0R00V+7+WW, ComponentLink1URL=http://industrial.panasonic.com/www-cgi/jvcr13pz.cgi?E+PZ+3+AOA0001+ERJ6GEY0R00V+7+WW, Composition="Thick Film", Failure Rate=-, Features="Automotive AEC-Q200", Height - Seated (Max)="0.028\" (0.70mm)", Packaging="Cut Tape (CT)", Part Status=Active, Pricing 1="1=0.1, 10=0.024, 25=0.0172, 50=0.0132, 100=0.0097, 250=0.00744, 500=0.00594, 1000=0.00437 (USD)", RoHS="RoHS Compliant", Size / Dimension="0.079\" L x 0.049\" W (2.00mm x 1.25mm)", Stock 1=562130, Supplier 1=Digi-Key
R3: library part RES1k50603, "RES SMD 1.5K OHM 1% 1/10W 0603", Manufacturer="Panasonic Electronic Components", Manufacturer Part Number=ERJ-3EKF1501V, Operating Temperature="-55°C ~ 155°C", Package / Case="0603 (1608 Metric)", Power (Watts)="0.1W, 1/10W", Supplier Device Package=0603, Supplier Part Number 1=P1.50KHCT-ND, Temperature Coefficient=±100ppm/°C, Tolerance=±1%, Category=Resistors, ComponentLink1Description=https://industrial.panasonic.com/cdbs/www-data/pdf/RDA0000/AOA0000C298.pdf, ComponentLink1URL=https://industrial.panasonic.com/cdbs/www-data/pdf/RDA0000/AOA0000C298.pdf, Composition="Thick Film", Failure Rate=-, Features="Automotive AEC-Q200", Height - Seated (Max)="0.022\" (0.55mm)", Packaging="Cut Tape (CT)", Part Status=Active, Pricing 1="1=0.1, 10=0.021, 100=0.0087, 1000=0.00389, 2500=0.00338 (USD)", Resistance (Ohms)=1.5k, RoHS="RoHS Compliant", Size / Dimension="0.063\" L x 0.031\" W (1.60mm x 0.80mm)", Stock 1=0, Supplier 1=Digi-Key
R5 R14: library part RES1k0603, "RES SMD 1K OHM 1% 1/10W 0603", Manufacturer="Panasonic Electronic Components", Manufacturer Part Number=ERJ-3EKF1001V, Operating Temperature="-55°C ~ 155°C", Package / Case="0603 (1608 Metric)", Power (Watts)="0.1W, 1/10W", Supplier Device Package=0603, Supplier Part Number 1=P1.00KHDKR-ND, Temperature Coefficient=±100ppm/°C, Tolerance=±1%, Category=Resistors, ComponentLink1Description=https://industrial.panasonic.com/cdbs/www-data/pdf/RDA0000/AOA0000C298.pdf, ComponentLink1URL=https://industrial.panasonic.com/cdbs/www-data/pdf/RDA0000/AOA0000C298.pdf, Composition="Thick Film", Failure Rate=-, Features="Automotive AEC-Q200", Height - Seated (Max)="0.022\" (0.55mm)", Packaging=Digi-Reel®, Part Status=Active, Pricing 1="1=0.1, 10=0.021, 100=0.0087, 1000=0.00389, 2500=0.00338 (USD)", Resistance (Ohms)=1k, RoHS="RoHS Compliant", Size / Dimension="0.063\" L x 0.031\" W (1.60mm x 0.80mm)", Stock 1=0, Supplier 1=Digi-Key
R6 R7 R8 R9 R10 R11 R12 R15 R18 R19 R20 R21 R22: library part RES10k0603, "RES SMD 10K OHM 1% 1/10W 0603", Manufacturer="Panasonic Electronic Components", Manufacturer Part Number=ERJ-3EKF1002V, Operating Temperature="-55°C ~ 155°C", Package / Case="0603 (1608 Metric)", Power (Watts)="0.1W, 1/10W", Supplier Device Package=0603, Supplier Part Number 1=P10.0KHDKR-ND, Temperature Coefficient=±100ppm/°C, Tolerance=±1%, Category=Resistors, ComponentLink1Description=https://industrial.panasonic.com/cdbs/www-data/pdf/RDA0000/AOA0000C298.pdf, ComponentLink1URL=https://industrial.panasonic.com/cdbs/www-data/pdf/RDA0000/AOA0000C298.pdf, Composition="Thick Film", Failure Rate=-, Features="Automotive AEC-Q200", Height - Seated (Max)="0.022\" (0.55mm)", Packaging=Digi-Reel®, Part Status=Active, Pricing 1="1=0.1, 10=0.021, 100=0.0087, 1000=0.00389, 2500=0.00338 (USD)", Resistance (Ohms)=10k, RoHS="RoHS Compliant", Size / Dimension="0.063\" L x 0.031\" W (1.60mm x 0.80mm)", Stock 1=0, Supplier 1=Digi-Key
R13: library part RES00603, "RES SMD 0.0OHM JUMPER 1/10W 0603", Manufacturer="Panasonic Electronic Components", Manufacturer Part Number=ERJ-3GEY0R00V, Operating Temperature="-55°C ~ 155°C", Package / Case="0603 (1608 Metric)", Power (Watts)="0.1W, 1/10W", Supplier Device Package=0603, Supplier Part Number 1=P0.0GCT-ND, Temperature Coefficient=-, Tolerance=Jumper, Category=Resistors, ComponentLink1Description=http://industrial.panasonic.com/www-cgi/jvcr13pz.cgi?E+PZ+3+AOA0001+ERJ3GEY0R00V+7+WW, ComponentLink1URL=http://industrial.panasonic.com/www-cgi/jvcr13pz.cgi?E+PZ+3+AOA0001+ERJ3GEY0R00V+7+WW, Composition="Thick Film", Failure Rate=-, Features="Automotive AEC-Q200", Height - Seated (Max)="0.022\" (0.55mm)", Packaging="Cut Tape (CT)", Part Status=Active, Pricing 1="1=0.1, 10=0.016, 25=0.0116, 50=0.0088, 100=0.0065, 250=0.00496, 500=0.00396, 1000=0.00292 (USD)", Resistance (Ohms)=0.0, RoHS="RoHS Compliant", Size / Dimension="0.063\" L x 0.031\" W (1.60mm x 0.80mm)", Stock 1=8597757, Supplier 1=Digi-Key
R16: library part Resistor, "RES SMD 187K OHM 1% 1/10W 0603", Manufacturer="Panasonic Electronic Components", Manufacturer Part Number=ERJ-3EKF1873V, Operating Temperature="-55°C ~ 155°C", Package / Case="0603 (1608 Metric)", Power (Watts)="0.1W, 1/10W", Supplier Device Package=0603, Supplier Part Number 1=P187KHCT-ND, Temperature Coefficient=±100ppm/°C, Tolerance=±1%, Category=Resistors, ComponentLink1Description=https://industrial.panasonic.com/cdbs/www-data/pdf/RDA0000/AOA0000C298.pdf, ComponentLink1URL=https://industrial.panasonic.com/cdbs/www-data/pdf/RDA0000/AOA0000C298.pdf, Composition="Thick Film", Failure Rate=-, Features="Automotive AEC-Q200", Height - Seated (Max)="0.022\" (0.55mm)", Packaging="Cut Tape (CT)", Part Status=Active, Pricing 1="1=0.1, 10=0.021, 100=0.0087, 1000=0.00389, 2500=0.00338 (USD)", Resistance (Ohms)=187k, RoHS="RoHS Compliant", Size / Dimension="0.063\" L x 0.031\" W (1.60mm x 0.80mm)", Stock 1=17711, Supplier 1=Digi-Key
R17: library part Resistor, "RES SMD 182K OHM 1% 1/10W 0603", Manufacturer="Panasonic Electronic Components", Manufacturer Part Number=ERJ-3EKF1823V, Operating Temperature="-55°C ~ 155°C", Package / Case="0603 (1608 Metric)", Power (Watts)="0.1W, 1/10W", Supplier Device Package=0603, Supplier Part Number 1=P182KHCT-ND, Temperature Coefficient=±100ppm/°C, Tolerance=±1%, Category=Resistors, ComponentLink1Description=https://industrial.panasonic.com/cdbs/www-data/pdf/RDA0000/AOA0000C298.pdf, ComponentLink1URL=https://industrial.panasonic.com/cdbs/www-data/pdf/RDA0000/AOA0000C298.pdf, Composition="Thick Film", Failure Rate=-, Features="Automotive AEC-Q200", Height - Seated (Max)="0.022\" (0.55mm)", Packaging="Cut Tape (CT)", Part Status=Active, Pricing 1="1=0.1, 10=0.021, 100=0.0087, 1000=0.00389, 2500=0.00338 (USD)", Resistance (Ohms)=182k, RoHS="RoHS Compliant", Size / Dimension="0.063\" L x 0.031\" W (1.60mm x 0.80mm)", Stock 1=140068, Supplier 1=Digi-Key
TVS1: library part TVS, "TVS DIODE 7V 12V DO214AA", Capacitance @ Frequency=-, Current - Peak Pulse (10/1000µs)=50A, Manufacturer 1="Littelfuse Inc.", Operating Temperature="-65°C ~ 150°C (TJ)", Package / Case="DO-214AA, SMB", Power - Peak Pulse=600W, Power Line Protection=No, Supplier Device Package="DO-214AA (SMBJ)", Supplier Part Number 1=SMBJ7.0ALFCT-ND, Voltage - Breakdown (Min)=7.78V, Voltage - Clamping (Max) @ Ipp=12V, Voltage - Reverse Standoff (Typ)=7V, Applications="General Purpose", Category 1="Circuit Protection", ComponentLink1Description=http://www.littelfuse.com/~/media/electronics/datasheets/tvs_diodes/littelfuse_tvs_diode_smbj_datasheet.pdf.pdf, ComponentLink1URL=http://www.littelfuse.com/~/media/electronics/datasheets/tvs_diodes/littelfuse_tvs_diode_smbj_datasheet.pdf.pdf, Description 1="TVS DIODE 7V 12V DO214AA", Manufacturer Part Number 1=SMBJ7.0A, Mounting Type="Surface Mount", Packaging="Cut Tape (CT)", Part Status=Active, Pricing 1="1=0.42, 10=0.327, 25=0.2756, 100=0.2244, 250=0.18588, 500=0.15384, 1000=0.11538 (USD)", RoHS 1="RoHS Compliant", Stock 1=18983, Supplier 1=Digi-Key, Type=Zener
U1: "IC REG LDO FIX/ADJ 1A 16QFN", Current - Limit (Min)=1.1A, Current - Output=1A, Manufacturer="Texas Instruments", Manufacturer Part Number=TPS7A7100RGTR, Operating Temperature="-40°C ~ 125°C", Package / Case="16-VFQFN Exposed Pad", Supplier Device Package="16-QFN (3x3)", Supplier Part Number 1=296-40978-1-ND, Voltage - Dropout (Typical)=-, Voltage - Input="1.425 V ~ 6.5 V", Voltage - Output="0.9 V ~ 5 V", Category="Integrated Circuits (ICs)", ComponentLink1Description=http://www.ti.com/lit/ds/symlink/tps7a7100.pdf, ComponentLink1URL=http://www.ti.com/lit/ds/symlink/tps7a7100.pdf, Mounting Type="Surface Mount", Packaging="Cut Tape (CT)", Part Status=Active, Pricing 1="1=2.19, 10=1.965, 100=1.5796, 500=1.2978, 1000=1.07532 (USD)", Regulator Topology="Positive Fixed or Adjustable", RoHS="RoHS Compliant", Stock 1=5133, Supplier 1=Digi-Key
U2: "IC MCU 32BIT 1MB FLASH 100LQFP", Manufacturer="NXP USA Inc.", Operating Temperature="-40°C ~ 105°C (TA)", Package / Case=100-LQFP, Supplier Device Package="100-LQFP (14x14)", Supplier Part Number 1=MK64FN1M0VLL12-ND, Voltage - Supply (Vcc/Vdd)="1.71 V ~ 3.6 V", Category="Integrated Circuits (ICs)", ComponentLink1Description=http://cache.freescale.com/files/microcontrollers/doc/data_sheet/K64P144M120SF5.pdf, ComponentLink1URL=http://cache.freescale.com/files/microcontrollers/doc/data_sheet/K64P144M120SF5.pdf, Connectivity="CAN, EBI/EMI, Ethernet, I²C, IrDA, SD, SPI, UART/USART, USB, USB OTG", Core Processor="ARM® Cortex®-M4", Core Size=32-Bit, Data Converters="A/D 32x16b, D/A 1x12b", EEPROM Size=-, Manufacturer Part Number=MK64FN1M0VLL12, Number of I/O=66, Oscillator Type=Internal, Packaging=Tray, Part Status=Active, Peripherals="DMA, I²S, LVD, POR, PWM, WDT", Pricing 1="1=13, 10=11.947, 100=10.7003 (USD)", Program Memory Size="1MB (1M x 8)", Program Memory Type=FLASH, RAM Size="256K x 8", RoHS="RoHS Compliant", Speed=120MHz, Stock 1=0, Supplier 1=Digi-Key
U3: library part TPL5010, "IC TIMER W/WATCHDOG 6SOT", Current - Supply=35nA, Frequency=-, Manufacturer="Texas Instruments", Manufacturer Part Number=TPL5010QDDCRQ1, Operating Temperature="-40°C ~ 125°C", Package / Case="SOT-23-6 Thin, TSOT-23-6", Supplier Device Package=TSOT-23-6, Supplier Part Number 1=296-44963-1-ND, Voltage - Supply="1.8 V ~ 5 V", Category="Integrated Circuits (ICs)", ComponentLink1Description=http://www.ti.com/lit/ds/symlink/tpl5010-q1.pdf, ComponentLink1URL=http://www.ti.com/lit/ds/symlink/tpl5010-q1.pdf, Count=-, Mounting Type="Surface Mount", Packaging="Cut Tape (CT)", Part Status=Active, Pricing 1="1=1.27, 10=1.136, 100=0.886, 500=0.73192, 1000=0.57783 (USD)", RoHS="RoHS Compliant", Stock 1=2785, Supplier 1=Digi-Key, Type="Programmable Timer"
U8: library part VZIGMOD2, "VNPT ZIGBEE MODULE V1 - No-PA", Frequency=2.4GHz, Manufacturer=VNPT-Technology, Operating Temperature="-40°C ~ 85°C", Package / Case="33-SMD Module", Power - Output=7dBm, Voltage - Supply="1.85 V ~ 3.8 V", Antenna Type="Integrated, PCB, External", Catgory="RF/IF and RFID", Data Rate=250kbps, Manufacturer Part Number=VZIGMOD1, Module=Connectivity, Mounting Type="Surface Mount", Sensitivity=-99dBm, Serial Interfaces="I²C, SPI, UART", Utilized IC / Part=CC2538

## Via types
v1: diameter 23.62, hole 11.81, Top Layer to Bottom Layer, tented both sides, 293 vias
v2: diameter 47.24, hole 23.62, Top Layer to Bottom Layer, tented both sides, 41 vias

## Nets (pads, with @x,y where several pads share a name; then routed paths per layer and width w, separated by ;. In a path a pad name is that pad's centre, name@x,y a point inside that pad or via, vN(x,y) a via of type N, cw(c..) or ccw(c..) an arc to the next point about the centre after c; other vN are vias at no path point)
ADD_LIGHT: P7.5 U2.33 | length 3064.4
  Top Layer w10: U2.33 2749.07,2066.93 2769,2047 v1(2898,2047) ; v1(5016,1165) 5274.62,1423.62 P7.5
  Bottom Layer w10: v1(2898,2047) 3173,2047 4055,1165 v1(5016,1165)
CLK_TH: P3.4 R10.1 U2.82 | length 2090.4
  Top Layer w10: U2.82 3342.61,1850.39 3358,1835 ; v1(3346,1670) 3358,1682 3358,1835 ; R10.1 3403.54,1850.39 3373.39,1850.39 3358,1835
  Bottom Layer w10: v1(3346,1670) 4079.53,936.47 P3.4
CLK_TH2: P6.4 R12.1 U2.42 | length 2994.8
  Top Layer w10: U2.42 v1@2881,1889.76
  Bottom Layer w10: v1(2881,1891) 2892.71,1891 R12.1 3277.23,1842.77 4803,317 4839,317 4959.15,196.85 P6.4
CMD_SD: J1.3 U2.4 | length 693.6
  Top Layer w10: U2.4 3169.29,2380.29 3218,2429 3593,2429 3622.05,2458.05 J1.3
DAT0_SD: J1.7 U2.2 | length 839.3
  Top Layer w10: U2.2 3208.66,2308.66 3229,2329 3758,2329 3795.28,2366.28 J1.7
DAT1_SD: J1.8 U2.1 | length 869.2
  Top Layer w10: U2.1 3791.7,2268.7 3838.58,2315.58 J1.8
DAT2_SD: J1.1 U2.6 | length 637.2
  Top Layer w10: U2.6 3129.92,2400.92 3196,2467 3508,2467 3535.43,2494.43 J1.1
DAT3_SD: J1.2 U2.5 | length 661
  Top Layer w10: U2.5 3149.61,2388.61 3208,2447 3544,2447 3578.74,2481.74 J1.2
DAT_TH: P3.3 R9.1 U2.83 | length 2143.7
  Top Layer w10: U2.83 3442.92,1870.08 R9.1 3447.76,1808 3397,1808 3376,1787 3376,1643 v1(3353,1620)
  Bottom Layer w10: v1(3353,1620) 3365,1620 3879.53,1105.47 P3.3
DAT_TH2: P6.3 R11.1 U2.43 | length 2848.9
  Top Layer w10: U2.43 2848.92,1870.08 v1(2854,1865)
  Bottom Layer w10: v1(2854,1865) 2876.23,1842.77 R11.1 2909.66,1815 3274,1815 4785.04,303.96 P6.3
DONE: U2.100 U3.4 | length 370.9
  Top Layer w10: U2.100 3660.43,2204.72 U3.4
EN_EC: Q3.1 R20.1 U2.92 | length 3421.4
  Top Layer w10: U2.92 3353.24,2047.24 3375,2069 3481,2069 3558,1992 3558,1616 3499,1557 3498,1558 3496,1556 v1(3320,1556)
  Top Layer w20: Q3.1 1076.77,1183.07 R20.1 1080.8,1256 v1(1138,1256)
  Bottom Layer w10: v1(1138,1256) 1417,1256 1547,1386 2635,1386 2843,1594 3282,1594 v1(3320,1556)
EN_PH: Q1.1 R18.1 U2.72 | length 1027.6
  Top Layer w10: v1(3150,1568) 3153,1568 3169.29,1584.29 U2.72
  Top Layer w15: Q1.1 2604.33,1183.07 R18.1 2663.97,1251.97 v1(2665,1253)
  Bottom Layer w10: v1(2665,1253) 3120,1253 3149,1282 v1@3149,1568
EN_PH2: Q2.1 R19.1 U2.94 | length 1401.1
  Top Layer w10: U2.94 3492.39,2086.61 3577,2002 3577,1605 3492,1520 v1(3299,1520)
  Top Layer w15: v1(3368.11,1305.89) R19.1 3372.05,1248.03 Q2.1
  Bottom Layer w10: v1(3299,1520) 3299,1375 v1(3368.11,1305.89)
EN_ZB: Q5.1 R22.1 U2.85 | length 2251.6
  Top Layer w10: U2.85 3437.45,1909.45 v1(3454,1926) ; v1(4602,2897) 4602,2860.6 R22.1 4663.39,2860.24 Q5.1
  Bottom Layer w10: v1(3454,1926) 3492,1964 4402,1964 4467,2029 4467,2431 4602,2566 v1(4602,2897)
GND: C2.1 C3.1 C4.1 C5.1 C6.1 C7.2 C8.2 C9.2 C10.2 C11.2 C12.2 C13.2 C14.1 C15.2 C16.1 C17.1 C18.1 C19.1 C20.1 C21.1 C22.1 C23.1 C24.1 C25.1 C26.1 H1. H4. J1.6 J1.10 J1.11 LED1.2 P1.1 P2.3 P2.4 P3.2 P6.2 P7.2 P10.1 P10.2 P11.1 P12.1 R6.1 R13.1 R16.1 R17.1 RST1.1 TVS1.1 U1.7 U1.8 U1.9 U1.10 U1.17 U2.9 U2.24 U2.25 U2.41 U2.49 U2.60 U2.74 U2.88 U3.2 U4.6 U5.6 U6.6 U7.6 U8.1 U8.2 U8.3 U8.35
  other v1: 4248.03,326.77 3366.14,342.52 3688.98,370.08 4551.18,389.76 3685.04,413.39 4232.28,413.39 4535.43,433.07 3685.04,472.44 4500,480.32 5051.18,480.32 4901.57,484.25 4980.32,484.25 4232.28,488.19 3366.14,496.06 3425.2,661.42 3716.54,700.79 4216.54,755.91 4696.85,759.84 4586.61,763.78 3673.23,767.72 4755.91,767.72 4846.46,767.72 826.77,814.96 870.08,814.96 901.57,814.96 4169.29,822.83 3141.73,826.77 2192.91,830.71 2236.22,830.71 2279.53,830.71 1503.94,834.65 1555.12,834.65 1456.69,838.58 2976.38,842.52 3062.99,842.52 3657.48,893.7 681.1,952.76 728.35,952.76 771.65,952.76 2208.66,964.57 2145.67,968.5 2271.65,972.44 1118.11,976.38 2940.94,984.25 3023.62,984.25 3098.43,988.19 2622.05,992.13 3444.88,992.13 1440.94,996.06 1492.13,996.06 1535.43,996.06 1870.08,1000 1118.11,1015.75 2618.11,1047.24 1118.11,1051.18 1862.2,1055.12 3996.06,1055.12 3429.13,1066.93 3791.34,1082.68 2618.11,1090.55 3960.63,1094.49 4401.57,1094.49 1862.2,1098.43 4220.47,1102.36 4322.83,1102.36 3925.2,1125.98 3748.03,1137.8 3688.98,1192.91 4307.09,1271.65 4196.85,1275.59 4240.16,1275.59 3771.65,1283.46 3728.35,1322.83 4716.54,1338.58 4795.28,1350.39 3690.94,1358.27 3984.25,1405.51 3759.84,1407.48 3720.47,1456.69 3897.64,1472.44 3671.26,1496.06 1381.89,1543.31 1551.18,1574.8 3822.83,1574.8 1448.82,1582.68 5460.63,1594.49 3444.88,1604.33 2629.92,1637.8 2681.1,1637.8 3523.62,1653.54 5460.63,1675.2 3484.25,1683.07 3454.72,1712.6 2614.17,1736.22 688.98,1748.03 2909.45,1748.03 5204.72,1755.91 5290.03,1755.91 5375.33,1755.91 5460.63,1755.91 3098.43,1763.78 3059.06,1767.72 3145.67,1767.72 3889.76,1807.09 3988.19,1807.09 688.98,1811.02 3940.94,1811.02 2842.52,1818.9 2448.82,1834.65 2594.49,1838.58 2803.15,1838.58 2759.84,1842.52 5204.72,1845.58 2622.05,1866.14 2444.88,1885.83 2594.49,1885.83 677.17,1905.51 3763.78,1929.13 3814.96,1929.13 3858.27,1929.13 2440.94,1933.07 4275.59,1933.07 5204.72,1935.26 3531.5,1937.01 4452.76,1937.01 2775.59,1938.98 2834.65,1938.98 2942.91,1938.98 2992.13,1938.98 3031.5,1938.98 3198.82,1938.98 3149.61,1968.5 4503.94,1984.25 5204.72,2024.93 4303.15,2062.99 4531.5,2070.87 3944.88,2086.61 3846.46,2090.55 3897.64,2090.55 5204.72,2114.61 3011.81,2135.83 3051.18,2135.83 4334.65,2137.8 1059.06,2141.73 4527.56,2161.42 2448.82,2165.35 3818.9,2165.35 1011.81,2177.17 5204.72,2204.29 2763.78,2204.72 2992.13,2204.72 2452.76,2208.66 3100.39,2214.57 3159.45,2214.57 3218.5,2214.57 3377.95,2240.16 3448.82,2240.16 1039.37,2248.03 2468.5,2251.97 4334.65,2255.91 2598.43,2263.78 2667.32,2263.78 2726.38,2263.78 3870.08,2263.78 5204.72,2293.96 3279.53,2295.28 3338.58,2299.21 3771.65,2303.15 4535.43,2314.96 1066.93,2318.9 3905.51,2334.65 4338.58,2338.58 3228.35,2352.36 3346.46,2352.36 3425.2,2352.36 3543.31,2352.36 3651.57,2352.36 3740.16,2362.2 1066.93,2366.14 5204.72,2383.64 3248.03,2401.57 3316.93,2401.57 3375.98,2401.57 3474.41,2401.57 3582.68,2401.57 3641.73,2401.57 3897.64,2409.45 1177.17,2410.43 1207.68,2410.43 4586.61,2421.26 3750,2431.1 1177.17,2439.96 1207.68,2439.96 3671.26,2440.94 2692.91,2444.88 2751.97,2444.88 1374.02,2464.57 5204.72,2473.32 3129.92,2480.32 3671.26,2490.16 3750,2500 4641.73,2503.94 2992.13,2507.87 3259.84,2511.81 3401.57,2511.81 1370.08,2515.75 3318.9,2515.75 3937.01,2515.75 1090.55,2539.37 5204.72,2562.99 1370.08,2566.93 854.33,2570.87 811.02,2574.8 763.78,2578.74 1090.55,2606.3 5236.22,2610.24 5316.27,2610.24 5396.33,2610.24 5476.38,2610.24 1346.46,2622.05 1275.59,2641.73 1090.55,2653.54 5484.25,2661.42 4397.64,2673.23 3145.67,2688.98 3251.97,2688.98 3937.01,2688.98 3330.71,2692.91 3551.18,2704.72 3811.02,2704.72 4362.2,2708.66 3657.48,2712.6 3732.28,2712.6 2720.47,2728.35 4133.86,2732.28 4283.46,2744.09 2834.65,2748.03 2917.32,2748.03 755.91,2755.91 570.87,2759.84 653.54,2759.84 5484.25,2767.72 5484.25,2877.95 3035.43,2921.26 4200.79,2921.26 2751.97,2925.2 4098.43,2925.2 2881.89,2929.13 4622.05,2944.88 5480.32,3011.81 4649.61,3023.62 5476.38,3098.43
LED_STATUS: LED2.2 U2.98 | length 803.1
  Top Layer w10: LED2.2 2934,2610.8 v1(2934,2340) ; v1(2956.35,2165.35) U2.98
  Bottom Layer w10: v1(2934,2340) 2934,2285 2956.35,2262.65 v1(2956.35,2165.35)
NetC1_1: C1.1 U1.2 | length 73.8
  Top Layer w10: U1.2 1183.07,2311.02 C1.1
NetC4_2: C4.2 C5.2 L1.2 U1.12 U1.13 U1.14 | length 455.9
  Top Layer w10: C5.2 1064.4,2462.6 ; U1.14 1091.96,2435.04 1072.28,2454.72 ; U1.13 1072.28,2454.72 ; U1.12 1084.09,2482.28 1064.4,2462.6 ; 1064.4,2462.6 1072.28,2454.72
  Top Layer w20: C4.2 966.54,2462.6 C5.2
  Top Layer w30: L1.2 C4.2
NetC6_2: C6.2 U1.11 | length 107.1
  Top Layer w10: C6.2@1181.1,2588.58 1183.07,2586.61 U1.11
NetC11_1: C11.1 U2.26 | length 146.7
  Top Layer w10: C11.1 U2.26
NetC19_2: C19.2 Q1.3 U5.1 | length 759.1
  Top Layer w20: U5.1 2094.47,755.23 2094.47,843.53 2137.94,887 2520.94,887 2549.21,915.28 C19.2 2549.21,1066.93 Q1.3
NetC20_2: C20.2 Q2.3 U4.1 | length 780.2
  Top Layer w20: U4.1 2852.76,845.76 2894,887 3308.34,887 3336.61,915.28 C20.2 3334.65,1021.65 Q2.3
NetC23_2: C23.2 Q3.3 U6.1 | length 758.6
  Top Layer w20: U6.1 569.29,822.29 634,887 1017,887 1045.28,915.28 C23.2 1043.31,1021.65 Q3.3
NetC24_2: C24.2 Q4.3 U7.1 | length 758
  Top Layer w20: U7.1 1330.45,831.48 1385.97,887 1768.97,887 1797.24,915.28 C24.2 1797.24,1078.74 Q4.3
NetLED1_1: LED1.1 R5.1 | length 70
  Top Layer w15: LED1.1 1431.1,2248.44 R5.1
NetLED2_1: LED2.1 R14.2 | length 68.4
  Top Layer w25: R14.2 2921.67,2679.13 LED2.1
NetP4_1: P4.1 U4.2 | length 238.7
  Top Layer w20: P4.1 2952.76,518.11 U4.2
NetP4_2: P4.2 U4.3 | length 238.7
  Top Layer w20: P4.2 3052.76,518.11 U4.3
NetP5_1: P5.1 U5.2 | length 241.5
  Top Layer w25: U5.2 2191.6,524.93 P5.1
NetP5_2: P5.2 U5.3 | length 241.5
  Top Layer w25: U5.3 2291.6,524.93 P5.2
NetP8_1: P8.1 U6.2 | length 238.7
  Top Layer w25: P8.1 669.29,518.11 U6.2
NetP8_2: P8.2 U6.3 | length 238.7
  Top Layer w25: P8.2 769.29,518.11 U6.3
NetP9_1: P9.1 U7.2 | length 247
  Top Layer w25: U7.2 1430.45,538.06 P9.1
NetP9_2: P9.2 U7.3 | length 247
  Top Layer w25: U7.3 1530.45,538.06 P9.2
NetQ4_1: Q4.1 R21.1 U2.64 | length 1821.5
  Top Layer w10: U2.64 3011.81,1586.19 3029,1569 v1(3074,1569)
  Top Layer w15: v1(1841,1306) 1840.55,1305.55 R21.1 1840.55,1183.07 Q4.1
  Bottom Layer w10: v1(1841,1306) 3095,1306 3114,1325 3114,1529 v1(3074,1569)
NetR3_1: R3.1 U1.3 | length 146.9
  Top Layer w10: U1.3 1202.76,2348.24 1291.34,2259.66 R3.1
NetR6_2: R6.2 U2.12 U2.13 | length 191.5
  Top Layer w10: U2.13 2992.13,2333 ; R6.2 2992.13,2333 ; U2.12 3011.81,2313.31 2992.13,2333
NetR13_2: R13.2 U2.51 | length 112
  Top Layer w10: U2.51 v1(2755.91,1729.91)
  Bottom Layer w10: v1(2755.91,1729.91) 2757.87,1731.87 R13.2
NetR16_2: R16.2 R17.2 U3.3 | length 166.3
  Top Layer w12: U3.3 R16.2 R17.2
NetU2_84: U2.84 U8.33 | length 1610.7
  Top Layer w10: U2.84 v1(3475.76,1889.76) ; v1(4784.76,1889.76) 4785.04,1889.49 U8.33
  Bottom Layer w10: v1(3475.76,1889.76) v1(4784.76,1889.76)
NetU2_86: U2.86 U8.10 | length 1729.3
  Top Layer w10: U2.86 3409.13,1929.13 v1(3427,1947) ; U8.10 4435.04,2420.96 v1(4436,2420)
  Bottom Layer w10: v1(3427,1947) 3470,1990 4383,1990 4436,2043 v1(4436,2420)
NetU2_87: U2.87 U8.9 | length 1714.9
  Top Layer w10: U2.87 3385.82,1948.82 v1(3400,1963) ; U8.9 4485.04,2502.04 4485.08,2502 v1(4486,2502)
  Bottom Layer w10: v1(3400,1963) 3454,2017 4362,2017 4402,2057 4402,2419 4485,2502 v1(4486,2502)
NRESET: C18.2 R15.2 RST1.2 U2.52 U3.6 | length 1794.3
  Top Layer w10: v1(2775.59,1611.41) U2.52 ; v1(3523,1404) 3672,1553 3672,1767.68 3695.66,1791.34 ; U3.6 3662.4,2062.01 R15.2 3651.57,1919.29 RST1.2 3665.35,1821.65 3695.66,1791.34 ; C18.2 3695.66,1791.34
  Bottom Layer w10: v1(2775.59,1611.41) 3315.59,1611.41 v1(3523,1404)
P3V3: C1.2 C2.2 C3.2 P2.1 P2.2 P12.2 R1.1 R2.1 R3.2 R4.1 R5.2 U1.1 U1.15 U1.16 | length 4879.1
  Top Layer w10: C2.2 1135.83,2265.75 1135.83,2319.83 ; U1.15 U1.16 1135.83,2319.83 ; U1.1 1163.39,2347.39 1135.83,2319.83
  Top Layer w15: C2.2 C1.2 ; C3.2 1163.39,2190.94 R3.2 1293.31,2188.98 R5.2
  Top Layer w20: C2.2 1133.86,2220.47 C3.2 1161.42,2039.37 R2.1 R4.1 1478.56,2027.56 2107,2656 2107,2824 2151,2868 ; P2.2 P2.1 2104.72,2914.28 2151,2868 ; v2(2424,2868) 2151,2868
  Bottom Layer w20: v2(2424,2868) 4498,2868 4517.32,2887.32 P12.2
P3V3_MCU: C7.1 C8.1 C9.1 C10.1 C12.1 C13.1 C14.2 C15.1 C16.2 C17.2 J1.4 R1.2 R7.2 R8.2 R9.2 R10.2 R11.2 R12.2 R14.1 R15.1 U2.8 U2.22 U2.23 U2.30 U2.40 U2.48 U2.61 U2.75 U2.89 U3.1 | length 7744.5
  Top Layer w10: C16.2 U2.48 ; C14.2 U2.40 ; C13.1 U2.30 ; U2.23 2795.28,2310.31 2814.96,2330 ; C10.1@2811.02,2403.54 2814.96,2399.61 2814.96,2330 ; U2.22 2814.96,2330 ; U2.8 C8.1 ; U2.89 C9.1
  Top Layer w12: C10.1 v2(2889.72,2403.28) ; U2.61 2952.76,1713.76 2966,1727 v1(2994,1727) ; U2.75 v1(3253.69,1668.31)
  Top Layer w20: R14.1 2858.27,2512.73 2889.72,2481.28 v2(2889.72,2403.28) ; v2(3048.46,2403.54) C8.1 ; v2(3394,2028) 3440,2028 3466.54,2001.46 C9.1 3466.54,1958.66 3533,1892.2 3533,1788 3514.69,1769.69 R9.2 ; J1.4 v2(3665.35,2615.35) ; v1(3718.5,2090.5) R15.1 C17.2 3770.67,2052.17 U3.1
  Top Layer w25: R1.2 1271.65,1737.35 1318,1691 v2(2545,1691) 2545.28,1691.28 C16.2 C14.2 C13.1 v2(2545.28,2161.72) ; R10.2 R9.2
  Bottom Layer w15: v2(2545,1691) 2827,1691 2881.89,1745.89 R11.2 R12.2 2949.72,1767.07 C15.1 3225.72,1728 C12.1 3228,1694 v1(3253.69,1668.31)
  Bottom Layer w20: v2(2545.28,2161.72) 2545.28,2378.28 2570.28,2403.28 v2(2889.72,2403.28) ; R7.2 R8.2 2889.72,2179.18 v2(2889.72,2403.28) ; C7.1 3662.72,2617.99 v2(3665.35,2615.35) 3101.35,2615.35 3048.46,2562.46 v2(3048.46,2403.54) ; v1(3718.5,2090.5) 3449.5,2090.5 3394,2035 v2(3394,2028) 3343,2028 3226.5,2144.5 3111.5,2144.5 3048.46,2207.54 v2(3048.46,2403.54) ; v2(2889.72,2403.28) 2889.98,2403.54 v2(3048.46,2403.54)
P3V3_SS: C21.2 C22.2 C25.2 P3.1 P6.1 P7.1 Q1.2 Q2.2 Q3.2 Q4.2 R2.2 R18.2 R19.2 R20.2 R21.2 | length 7134.5
  Top Layer w25: Q3.2 1009.84,1183.07 R20.2 1009.84,1318.84 1039,1348 1138.46,1348 1173.23,1382.77 ; R2.2 1173.23,1382.77 ; Q4.2 1773.62,1183.07 R21.2 1773.62,1325.62 ; Q1.2 2537.4,1183.07 R18.2 2537.4,1323.4 ; Q2.2 3301.18,1183.07 R19.2 3301.18,1306.82 3262,1346 ; P3.1 3474.41,201.97 C21.2 3474.41,517.41 3544.92,587.92 ; P6.1 4379.92,201.97 C22.2 4379.92,587.92 ; P7.1 5272.05,620.08 C25.2 4412.08,620.08 4379.92,587.92 ; 1173.23,1382.77 1208,1348 1751.24,1348 1773.62,1325.62 ; 1773.62,1325.62 1794,1346 2514.8,1346 2537.4,1323.4 ; 2537.4,1323.4 2560,1346 3262,1346 ; 3262,1346 3319,1403 3436,1403 3544.92,1294.08 3544.92,587.92 ; 3544.92,587.92 4379.92,587.92
P3V3_ZB: Q5.2 R4.2 R22.2 | length 3648.7
  Top Layer w30: R4.2 1512.82,1948.82 2357.31,2793.31 v2(2488.31,2793.31) ; v2(4557.31,2793.31) R22.2 4663.39,2793.31 Q5.2
  Bottom Layer w30: v2(2488.31,2793.31) v2(4557.31,2793.31)
P3V3_ZBE: C26.2 Q5.3 U8.4 | length 255.1
  Top Layer w25: U8.4 4735.04,2662.2 C26.2 Q5.3
P5V0: L1.1 P1.2 TVS1.2 | length 388.9
  Top Layer w30: P1.2 436.22,2472.44 L1.1
RX_DBG_ZB: P11.2 U8.23 | length 163
  Top Layer w10: P11.2 4285.04,1627.56 U8.23
RX_EC: U2.91 U6.4 | length 2761.3
  Top Layer w10: v1(2915,2003) 2939.56,2027.56 U2.91
  Bottom Layer w10: U6.4 1181.36,1452.36 1728.19,1999.19 2911.19,1999.19 v1(2915,2003)
RX_EC2: P2.6 U2.63 U7.4 | length 3507.7
  Top Layer w10: U7.4 1940.36,1452.36 2035,1547 v1(2123,1547) 2774,1547 2792,1565 2964,1565 2992.13,1593.13 U2.63 ; v1(2123,1959) 2123,2278 2545,2700 2545,3010 2512,3043 2355.03,3043 P2.6
  Bottom Layer w10: v1(2123,1547) v1(2123,1959)
RX_PH: U2.76 U5.4 | length 1215.1
  Top Layer w10: U5.4 2747.36,1452.36 2816,1521 3249,1521 3292.32,1564.32 U2.76
RX_PH2: U2.96 U4.4 | length 1459.4
  Top Layer w10: U4.4 3538.36,1452.36 3616,1530 3616,2031 3521.02,2125.98 U2.96
SCL_LIGHT: P7.4 R7.1 U2.31 | length 2950.9
  Top Layer w10: U2.31 v1(2795.3,2106.3)
  Bottom Layer w10: v1(2795.3,2106.3) 2797.27,2108.27 R7.1 2865.91,2077 3176,2077 4029.38,1223.62 P7.4
SD_CD: J1.9
SD_CLK: J1.5 U2.3 | length 770